# EAGLE board Putri Shaqila_esp32-driver (EAGLE 9.6.2)
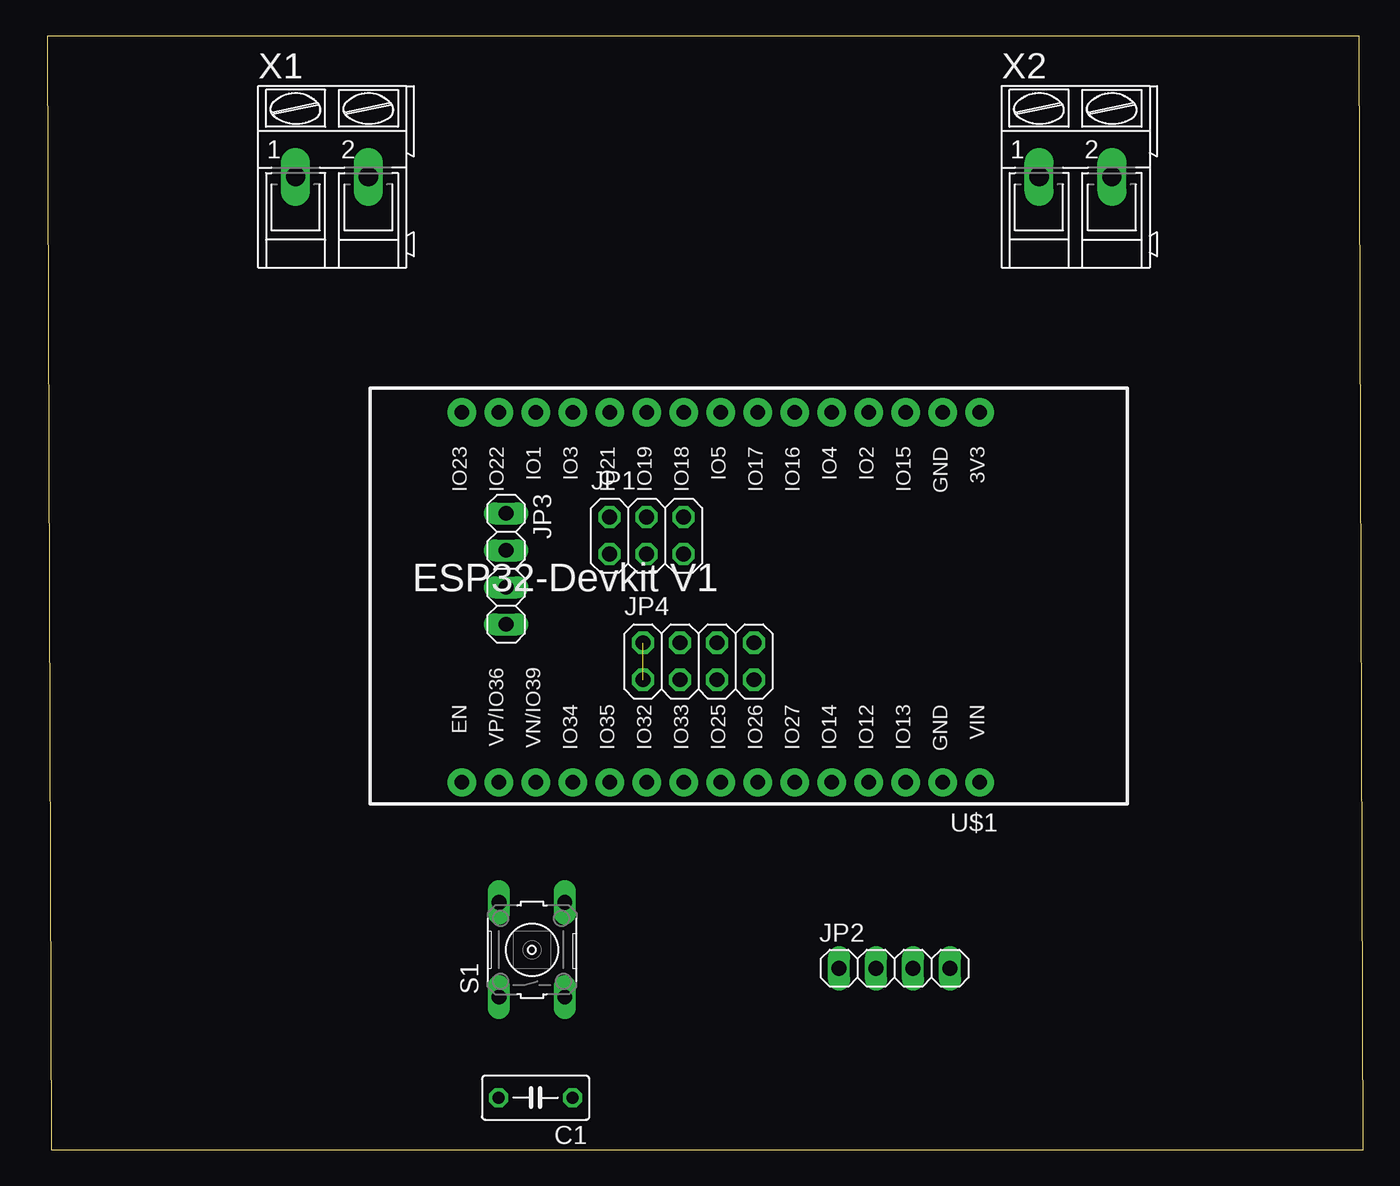
[diagram p0: board, top side]
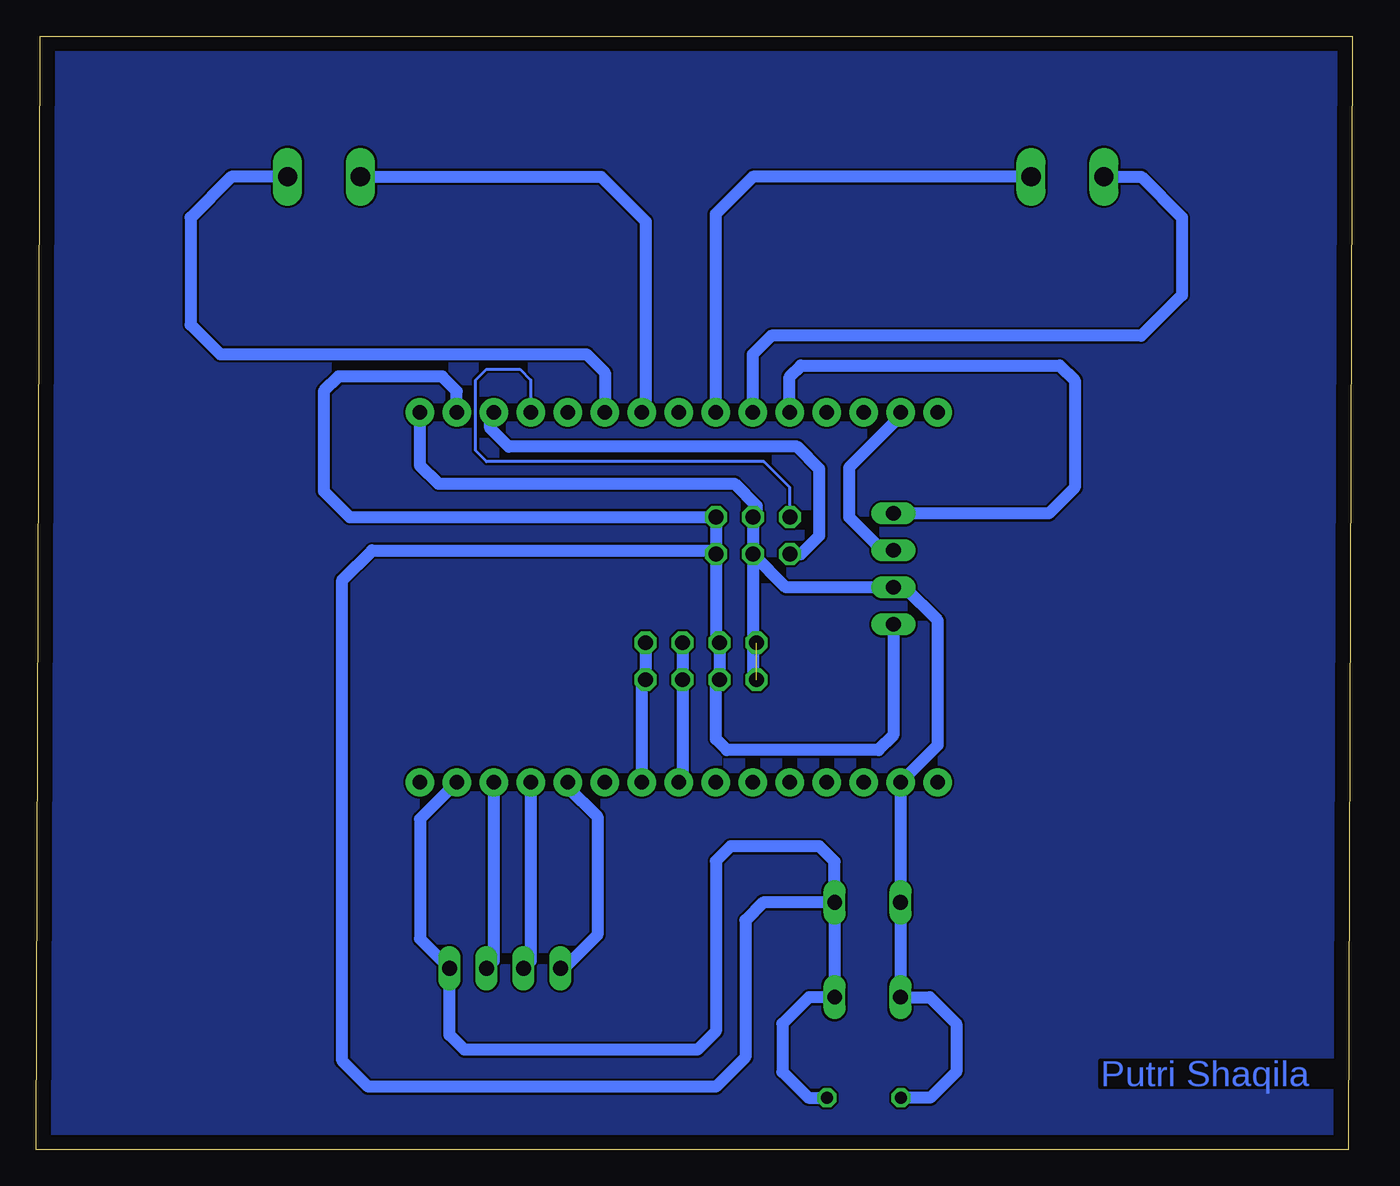
[diagram p1: board, bottom side, seen from below]

Size 90.35 x 76.44 mm. Coordinates in mm from the lower left corner, seen from the top.
Outline: 0.25,0 90.35,0 90.09,76.44 0,76.44 0.25,0
Copper layers (1*16): Top 0.035mm / dielectric 1.5mm / Bottom 0.035mm
Design rules "default": minimum track width 6mil, minimum drill 0.35mm, track to track 6mil, track to pad 6mil, pad to pad 6mil, via to via 6mil, smd to smd 6mil, copper to edge 40mil, drill to drill 6mil, minimum pad ring 10mil, minimum via ring 8mil, stop-mask expansion 4mil, vias tented up to drill 0mil, thermal gap 10mil

## Footprints (pad centres in the part's own frame; a part is rotated, then mirrored left to right if it is on the bottom)
C050-030X075 = drill 0.813 octagon: 1 -2.54,0; 2 2.54,0
2X03 = drill 1.016 octagon: 1 -2.54,-1.27; 2 -2.54,1.27; 3 0,-1.27; 4 0,1.27; 5 2.54,-1.27; 6 2.54,1.27
1X04 = drill 1.016 long: 1 -3.81,0; 2 -1.27,0; 3 1.27,0; 4 3.81,0
2X04 = drill 1.016 octagon: 1 -3.81,-1.27; 2 -3.81,1.27; 3 -1.27,-1.27; 4 -1.27,1.27; 5 1.27,-1.27; 6 1.27,1.27; 7 3.81,-1.27; 8 3.81,1.27
B3F-10XX = drill 1.016 long: 1 -3.251,2.261; 2 3.251,2.261; 3 -3.251,-2.261; 4 3.251,-2.261
ESP32-DEVKITV1 = drill 1 pad 1.93: 3V3 -16.52,-12.27; D1 13.96,-12.27; D2 -8.9,-12.27; D3 11.42,-12.27; D4 -6.36,-12.27; D5 1.26,-12.27; D12 -8.9,13.135; D13 -11.44,13.135; D14 -6.36,13.135; D15 -11.44,-12.27; D16 -3.82,-12.27; D17 -1.28,-12.27; D18 3.8,-12.27; D19 6.34,-12.27; D21 8.88,-12.27; D22 16.5,-12.27; D23 19.04,-12.27; D25 1.26,13.135; D26 -1.28,13.135; D27 -3.82,13.135; D32 6.34,13.135; D33 3.8,13.135; D34 11.42,13.135; D35 8.88,13.135; D36 16.5,13.135; D39 13.96,13.135; EN 19.04,13.135; GND@1 -13.98,13.135; GND@2 -13.98,-12.27; VIN -16.52,13.135
AK300/2 = drill 1.321 long: 1 -2.515,0; 2 2.489,0

## Placement (x,y rotation side)
C1  [C050-030X075]  33.53,3.56 180 top
JP1  [2X03]  41.15,42.16 0 top
JP2  [1X04]  58.17,12.45 0 top
JP3  [1X04]  31.5,39.88 270 top
JP4  [2X04]  44.7,33.53 0 top
S1  [B3F-10XX]  33.27,13.72 90 top
U$1  ESP32DEVKITV1  [ESP32-DEVKITV1]  47.5,38.35 180 top
X1  [AK300/2]  19.56,66.8 0 top
X2  [AK300/2]  70.61,66.8 0 top

## Library data of the parts
C1 = rcl; SPICEPREFIX: C
JP1-JP4 = pinhead
S1 = switch-omron; MPN: B3F-1000; OC_FARNELL: 176432; OC_NEWARK: 36M3542
U$1 = esp32-devkitv1
X1 X2 = con-ptr500; OC_FARNELL: unknown; OC_NEWARK: unknown

## Nets
GND: C1.1 JP1.5 JP1.6 JP2.4 JP3.4 JP4.3 JP4.4 S1.3 S1.4 U$1.GND@1 U$1.GND@2
MOISTURE: JP1.2 U$1.D2
N$1: U$1.D19 X1.1
N$2: U$1.D18 X1.2
N$3: U$1.D17 X2.1
N$4: U$1.D16 X2.2
OUT1: JP2.1 U$1.D14
OUT2: JP2.2 U$1.D12
OUT3: JP2.3 U$1.D13
PH: JP1.1 U$1.D15
SCL: JP3.2 U$1.D22
SCL2: JP4.5 JP4.6 U$1.D25
SDA: JP3.1 U$1.D21
SDA2: JP4.7 JP4.8 U$1.D26
V: C1.2 JP1.3 JP1.4 JP3.3 JP4.1 JP4.2 S1.1 S1.2 U$1.3V3 U$1.D36
VIN: U$1.VIN

## Tracks (layer width: path | path; a pad name or v marks a point on that pad's centre or on a via)
GND
  Bottom 0.813: 43.69,41.15 JP1.6 68.83,43.43 70.61,45.21 70.61,52.07 69.6,53.09 62.48,53.09 61.48,52.08 U$1.GND@2 | 43.69,41.15 JP1.5 43.69,35.05 JP4.4 JP4.3 | JP4.3 43.43,32 43.69,31.75 | 43.69,31.75 43.69,32 JP4.3 | JP3.4 31.5,28.45 32.51,27.43 42.93,27.43 43.69,28.19 43.69,31.75 | C1.1 37.34,3.56 39.12,5.33 39.12,8.64 37.29,10.46 S1.3 S1.4 | U$1.GND@1 64.01,22.69 64.01,14.48 JP2.4 61.98,7.87 60.96,6.86 44.96,6.86 43.69,8.13 43.69,19.81 42.67,20.83 36.58,20.83 35.54,19.79 S1.4 | S1.4 40.44,16.97 41.66,15.75 41.66,6.35 43.69,4.32 67.56,4.32 69.34,6.1 69.34,39.12 67.31,41.15 43.69,41.15
MOISTURE
  Bottom 0.203: JP1.2 38.61,45.47 40.39,47.24 59.44,47.24 60.2,48.01 60.2,52.83 59.44,53.59 57.15,53.59 56.4,52.84 U$1.D2
N$1
  Bottom 0.813: X1.1 14.48,66.8 11.68,64.01 11.68,58.67 14.48,55.88 39.88,55.88 41.16,54.6 U$1.D19
N$2
  Bottom 0.813: X1.2 41.15,66.8 43.7,64.25 U$1.D18
N$3
  Bottom 0.813: X2.1 51.56,66.8 48.51,63.75 48.51,50.89 U$1.D17
N$4
  Bottom 0.813: X2.2 76.96,66.8 79.76,64.01 79.76,56.64 77.72,54.61 52.58,54.61 51.31,53.34 51.31,50.63 U$1.D16
OUT1
  Bottom 0.813: U$1.D14 53.86,24.9 51.82,22.86 51.82,14.73 54.1,12.45 JP2.1
OUT2
  Bottom 0.813: U$1.D12 56.4,12.94 JP2.2
OUT3
  Bottom 0.813: U$1.D13 58.94,12.94 JP2.3
PH
  Bottom 0.813: JP1.1 37.85,40.89 36.58,42.16 36.58,46.74 38.1,48.26 57.91,48.26 59.18,49.53 59.18,50.38 U$1.D15
S$1
  pour Bottom: 0,75.95 0,0.25 0.25,0 89.92,0 89.92,75.95 90.17,76.2 -0.25,76.2 0.25,75.69
SCL
  Bottom 0.813: U$1.D22 31,50.37 34.54,46.82 34.54,43.43 32.26,41.15 JP3.2
SCL2
  Bottom 0.813: JP4.6 JP4.5 45.97,25.48 U$1.D25
SDA
  Bottom 0.813: U$1.D21 38.62,53.08 37.85,53.85 20.07,53.85 19.05,52.83 19.05,45.47 20.83,43.69 JP3.1
SDA2
  Bottom 0.813: JP4.8 JP4.7 48.78,31.99 U$1.D26
V  (1 unrouted)
  Bottom 0.813: JP1.3 JP1.4 40.89,43.69 40.89,44.2 42.42,45.72 62.74,45.72 64.02,47 U$1.3V3 | JP4.1 41.15,32.51 JP1.3 | JP1.3 38.86,38.61 JP3.3 30.73,38.61 28.45,36.32 28.45,27.77 U$1.D36 31,16.98 S1.2 S1.1 29.01,10.46 27.18,8.64 27.18,5.33 28.96,3.56 C1.2

## Text on the board
Bottom: Putri Shaqila